# EAGLE board pisangrevisi (EAGLE 7.1.0)
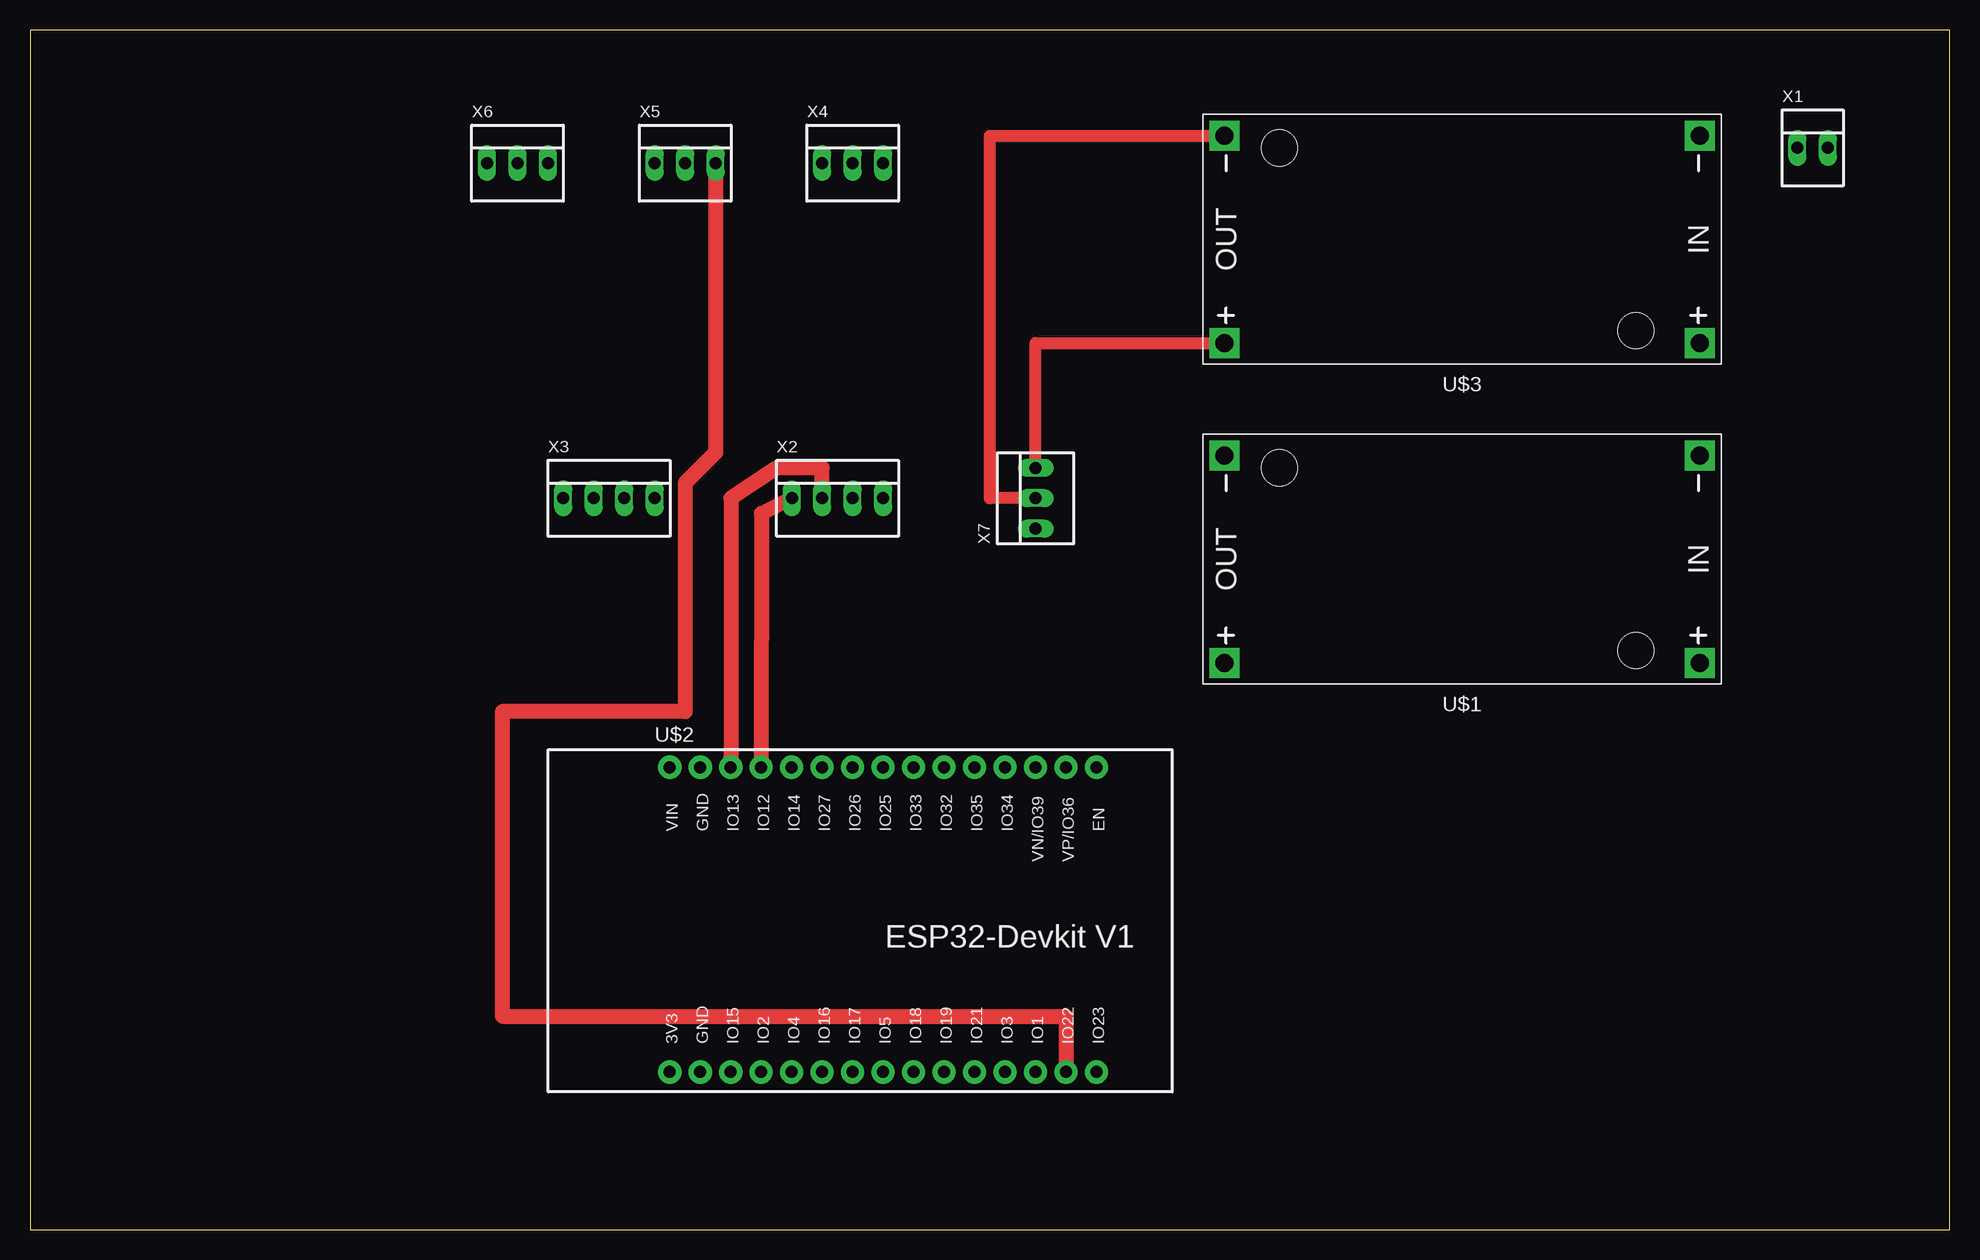
[diagram p0: board, top side]
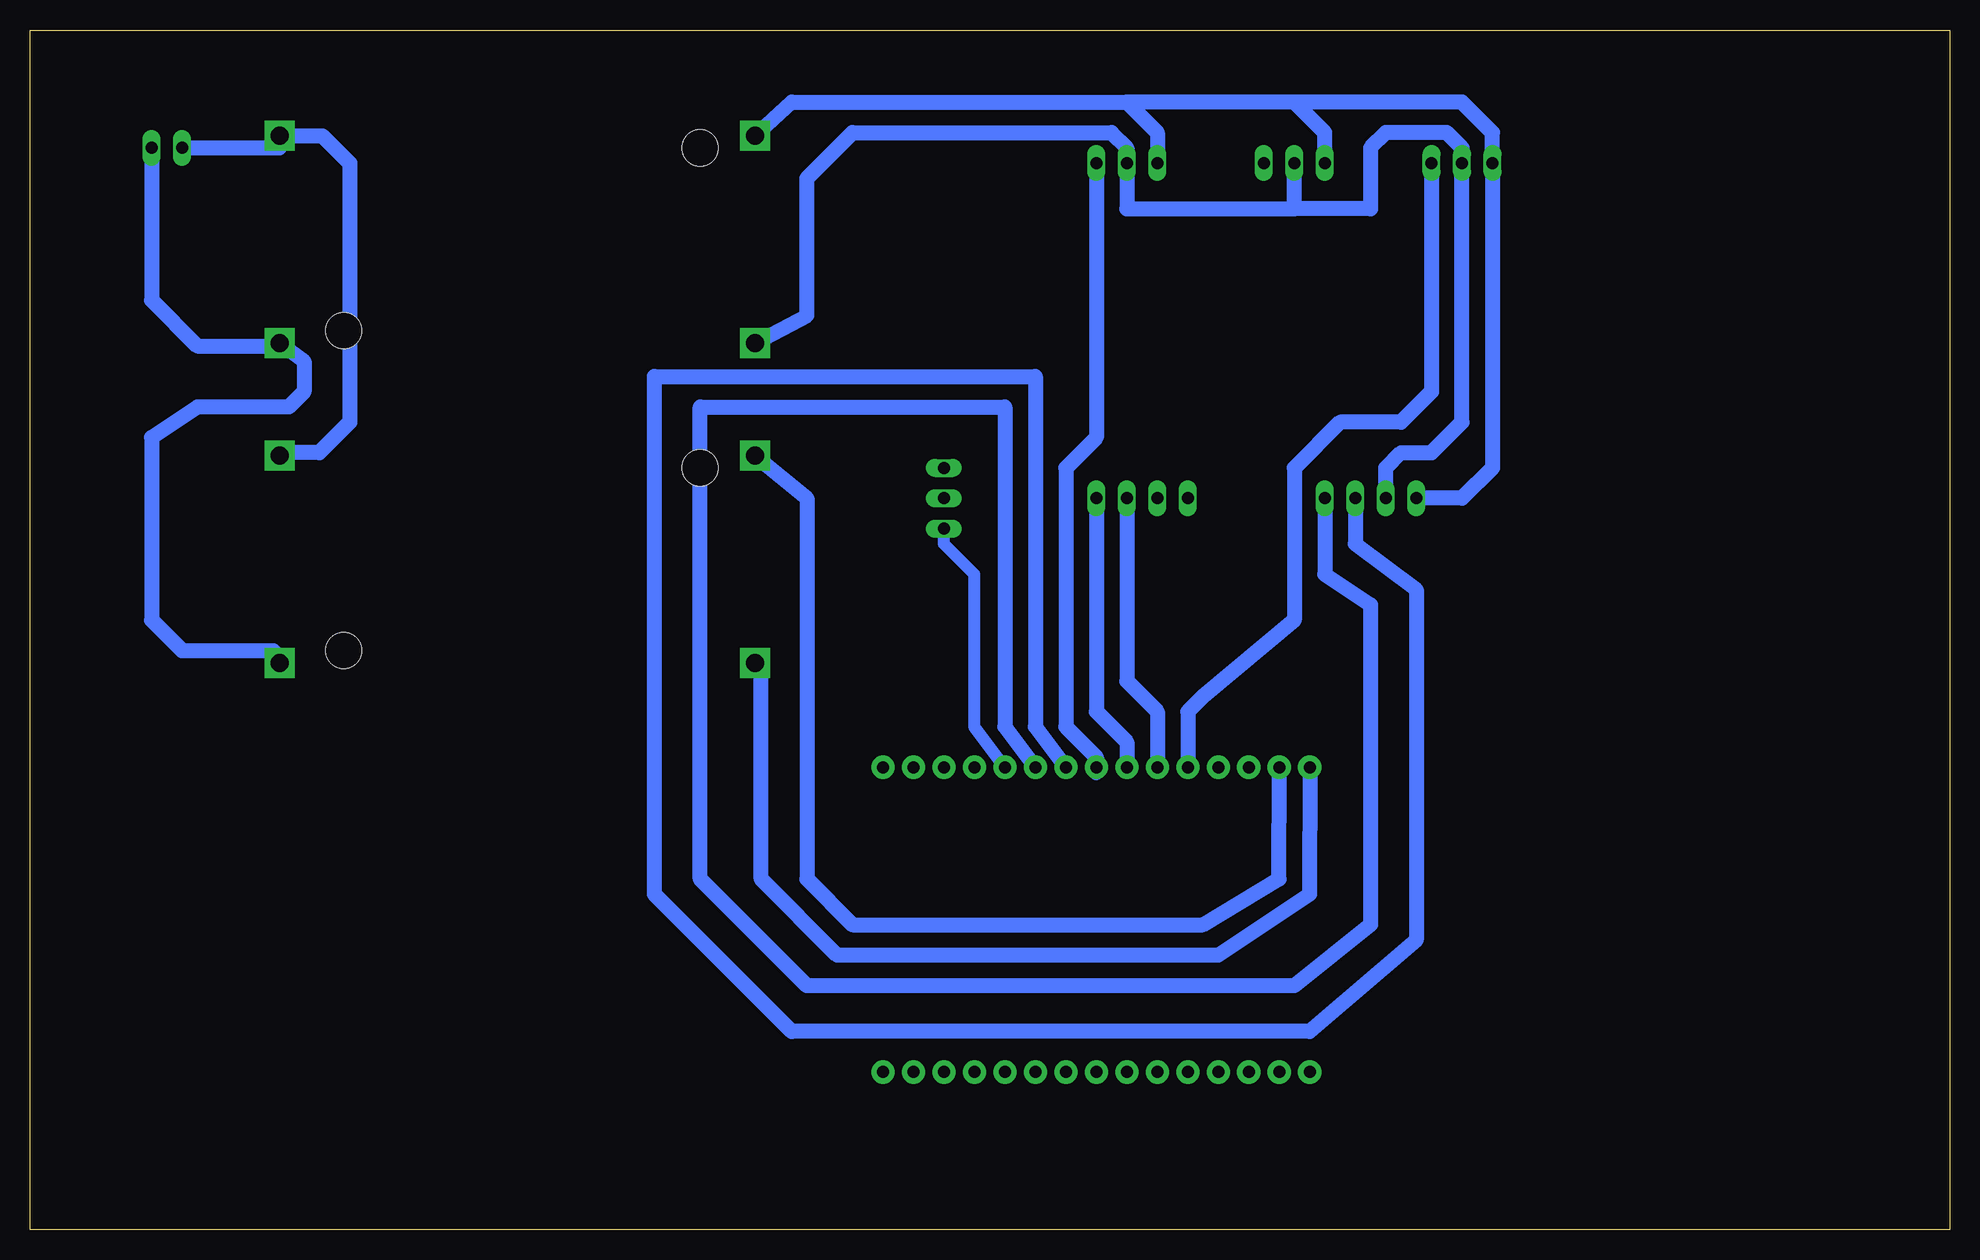
[diagram p1: board, bottom side, seen from below]

Size 160 x 100 mm. Coordinates in mm from the lower left corner, seen from the top.
Outline: 0,0 160,0 160,100 0,100 0,0
Copper layers (1*16): Top 0.035mm / dielectric 1.5mm / Bottom 0.035mm
Design rules "default": minimum track width 10mil, minimum drill 24mil, track to track 8mil, track to pad 8mil, pad to pad 8mil, via to via 8mil, smd to smd 8mil, copper to edge 40mil, drill to drill 8mil, minimum pad ring 10mil, minimum via ring 8mil, stop-mask expansion 4mil, vias tented up to drill 0mil, thermal gap 10mil

## Footprints (pad centres in the part's own frame; a part is rotated, then mirrored left to right if it is on the bottom)
DC-DC-STEP-DOWN-LM2596 = drill 1.5 pad 2.5 square: IN+ -19.812,8.636; IN- -19.812,-8.636; OUT+ 19.812,8.636; OUT- 19.812,-8.636 | hole 3: -14.478,7.62; 15.24,-7.62
ESP32-DEVKITV1 = drill 1 pad 1.93: 3V3 -16.52,-12.27; D1 13.96,-12.27; D2 -8.9,-12.27; D3 11.42,-12.27; D4 -6.36,-12.27; D5 1.26,-12.27; D12 -8.9,13.135; D13 -11.44,13.135; D14 -6.36,13.135; D15 -11.44,-12.27; D16 -3.82,-12.27; D17 -1.28,-12.27; D18 3.8,-12.27; D19 6.34,-12.27; D21 8.88,-12.27; D22 16.5,-12.27; D23 19.04,-12.27; D25 1.26,13.135; D26 -1.28,13.135; D27 -3.82,13.135; D32 6.34,13.135; D33 3.8,13.135; D34 11.42,13.135; D35 8.88,13.135; D36 16.5,13.135; D39 13.96,13.135; EN 19.04,13.135; GND@1 -13.98,13.135; GND@2 -13.98,-12.27; VIN -16.52,13.135
22-23-2021 = drill 1 long: 1 -1.27,0; 2 1.27,0
22-23-2041 = drill 1 long: 1 -3.81,0; 2 -1.27,0; 3 1.27,0; 4 3.81,0
22-23-2031 = drill 1 long: 1 -2.54,0; 2 0,0; 3 2.54,0

## Placement (x,y rotation side)
U$1  DC-DC-STEP-DOWN-LM2596  [DC-DC-STEP-DOWN-LM2596]  119.38,55.88 180 top
U$2  ESP32DEVKITV1  [ESP32-DEVKITV1]  69.85,25.4 0 top
U$3  DC-DC-STEP-DOWN-LM2596  [DC-DC-STEP-DOWN-LM2596]  119.38,82.55 180 top
X1  22-23-2021  [22-23-2021]  148.59,90.17 0 top
X2  22-23-2041  [22-23-2041]  67.31,60.96 0 top
X3  22-23-2041  [22-23-2041]  48.26,60.96 0 top
X4  22-23-2031  [22-23-2031]  68.58,88.9 0 top
X5  22-23-2031  [22-23-2031]  54.61,88.9 0 top
X6  22-23-2031  [22-23-2031]  40.64,88.9 0 top
X7  22-23-2031  [22-23-2031]  83.82,60.96 90 top

## Library data of the parts
U$1 U$3 = diy-modules (2)
U$2 = ESP32-DEVKITV1
X1 = con-molex; MF: MOLEX; MPN: 22-23-2021; OC_FARNELL: 1462926; OC_NEWARK: 25C3832
X2 X3 = con-molex; MF: MOLEX; MPN: 22-23-2041; OC_FARNELL: 1462920; OC_NEWARK: 38C0355
X4-X7 = con-molex; MF: MOLEX; MPN: 22-23-2031; OC_FARNELL: 1462950; OC_NEWARK: 30C0862

## Nets
5VIN: U$3.OUT+ X3.2 X4.2 X5.2 X6.2 X7.3
7VIN: U$1.OUT+ U$2.VIN
12V: U$1.IN+ U$3.IN+ X1.2
DS: U$2.D35 X7.1
GND: U$1.IN- U$3.IN- X1.1
GNDIN1: U$1.OUT- U$2.GND@1
GNDIN2: U$3.OUT- X3.1 X4.1 X5.1 X6.1 X7.2
IN1: U$2.D33 X3.3
IN2: U$2.D32 X3.4
OUT: U$2.D25 X4.3
S0: U$2.D12 X2.1
S1: U$2.D13 X2.2
S2: U$2.D27 X2.3
S3: U$2.D26 X2.4
SERVO: U$2.D14 X6.3
SUHU: U$2.D22 X5.3

## Tracks (layer width: path | path; a pad name or v marks a point on that pad's centre or on a via)
5VIN
  Top 1.016: X7.3 83.82,73.91 U$3.OUT+
  Bottom 1.27: U$3.OUT+ 95.25,76.2 95.25,87.63 91.44,91.44 69.85,91.44 68.58,90.17 X4.2 68.58,85.09 54.61,85.09 | X3.2 46.99,63.5 45.72,64.77 43.18,64.77 40.64,67.31 X6.2 40.64,90.17 41.91,91.44 46.99,91.44 48.26,90.17 48.26,85.09 54.61,85.09 | 54.61,85.09 X5.2
7VIN
  Bottom 1.27: U$2.VIN 53.34,27.94 60.96,22.86 92.71,22.86 99.06,29.21 99.06,46.99 U$1.OUT+
12V
  Bottom 1.27: X1.2 149.86,77.47 146.05,73.66 139.45,73.66 U$3.IN+ 137.16,72.39 137.16,69.85 138.43,68.58 146.05,68.58 149.86,66.04 149.86,50.8 147.32,48.26 139.7,48.26 U$1.IN+
DS
  Bottom 1.016: U$2.D35 81.28,41.91 81.28,54.61 83.82,57.15 X7.1
GND
  Bottom 1.27: X1.1 139.19,90.17 U$3.IN- 135.64,91.19 133.35,88.9 133.35,67.31 135.89,64.77 138.94,64.77 U$1.IN-
GNDIN1
  Bottom 1.27: U$1.OUT- 95.25,60.96 95.25,29.21 91.44,25.4 62.23,25.4 55.88,29.21 U$2.GND@1
GNDIN2
  Top 1.016: X7.2 80.01,60.96 80.01,91.19 U$3.OUT-
  Bottom 1.27: U$3.OUT- 96.52,93.98 68.58,93.98 | 68.58,93.98 66.04,91.44 X4.1 | X5.1 52.07,91.44 54.61,93.98 | 54.61,93.98 68.58,93.98 | 54.61,93.98 40.64,93.98 38.1,91.44 X6.1 38.1,63.5 40.64,60.96 X3.1
IN1
  Bottom 1.27: X3.3 49.53,57.15 44.45,53.34 44.45,24.13 53.34,16.51 96.52,16.51 107.95,27.94 107.95,71.12 76.2,71.12 76.2,41.91 U$2.D33
IN2
  Bottom 1.27: X3.4 52.07,54.61 48.26,52.07 48.26,25.4 54.61,20.32 95.25,20.32 104.14,29.21 104.14,68.58 78.74,68.58 78.74,41.91 U$2.D32
OUT
  Bottom 1.27: X4.3 71.12,66.04 73.66,63.5 73.66,41.91 71.12,39.37 71.12,38.1 U$2.D25
S0
  Top 1.27: X2.1 60.96,59.69 U$2.D12
S1
  Top 1.27: X2.2 66.04,63.5 62.23,63.5 58.42,60.96 58.42,39.37 U$2.D13
S2
  Bottom 1.27: X2.3 68.58,45.72 66.04,43.18 U$2.D27
S3
  Bottom 1.27: X2.4 71.12,43.18 68.58,40.64 U$2.D26
SERVO
  Bottom 1.27: X6.3 43.18,69.85 45.72,67.31 50.8,67.31 54.61,63.5 54.61,50.8 62.23,44.45 63.5,43.18 U$2.D14
SUHU
  Top 1.27: X5.3 57.15,64.77 54.61,62.23 54.61,43.18 39.37,43.18 39.37,17.78 86.36,17.78 U$2.D22